# Altium PCB TestKitPcb.PcbDoc
Units mm, origin at the board's own origin, x right, y up, seen from the top; angles counter-clockwise.
Board outline 140 x 120 mm, 2 copper layers (L1, L2), stack 1.671 mm thick; 114 components, 64 nets, 330 pads, 62 vias.
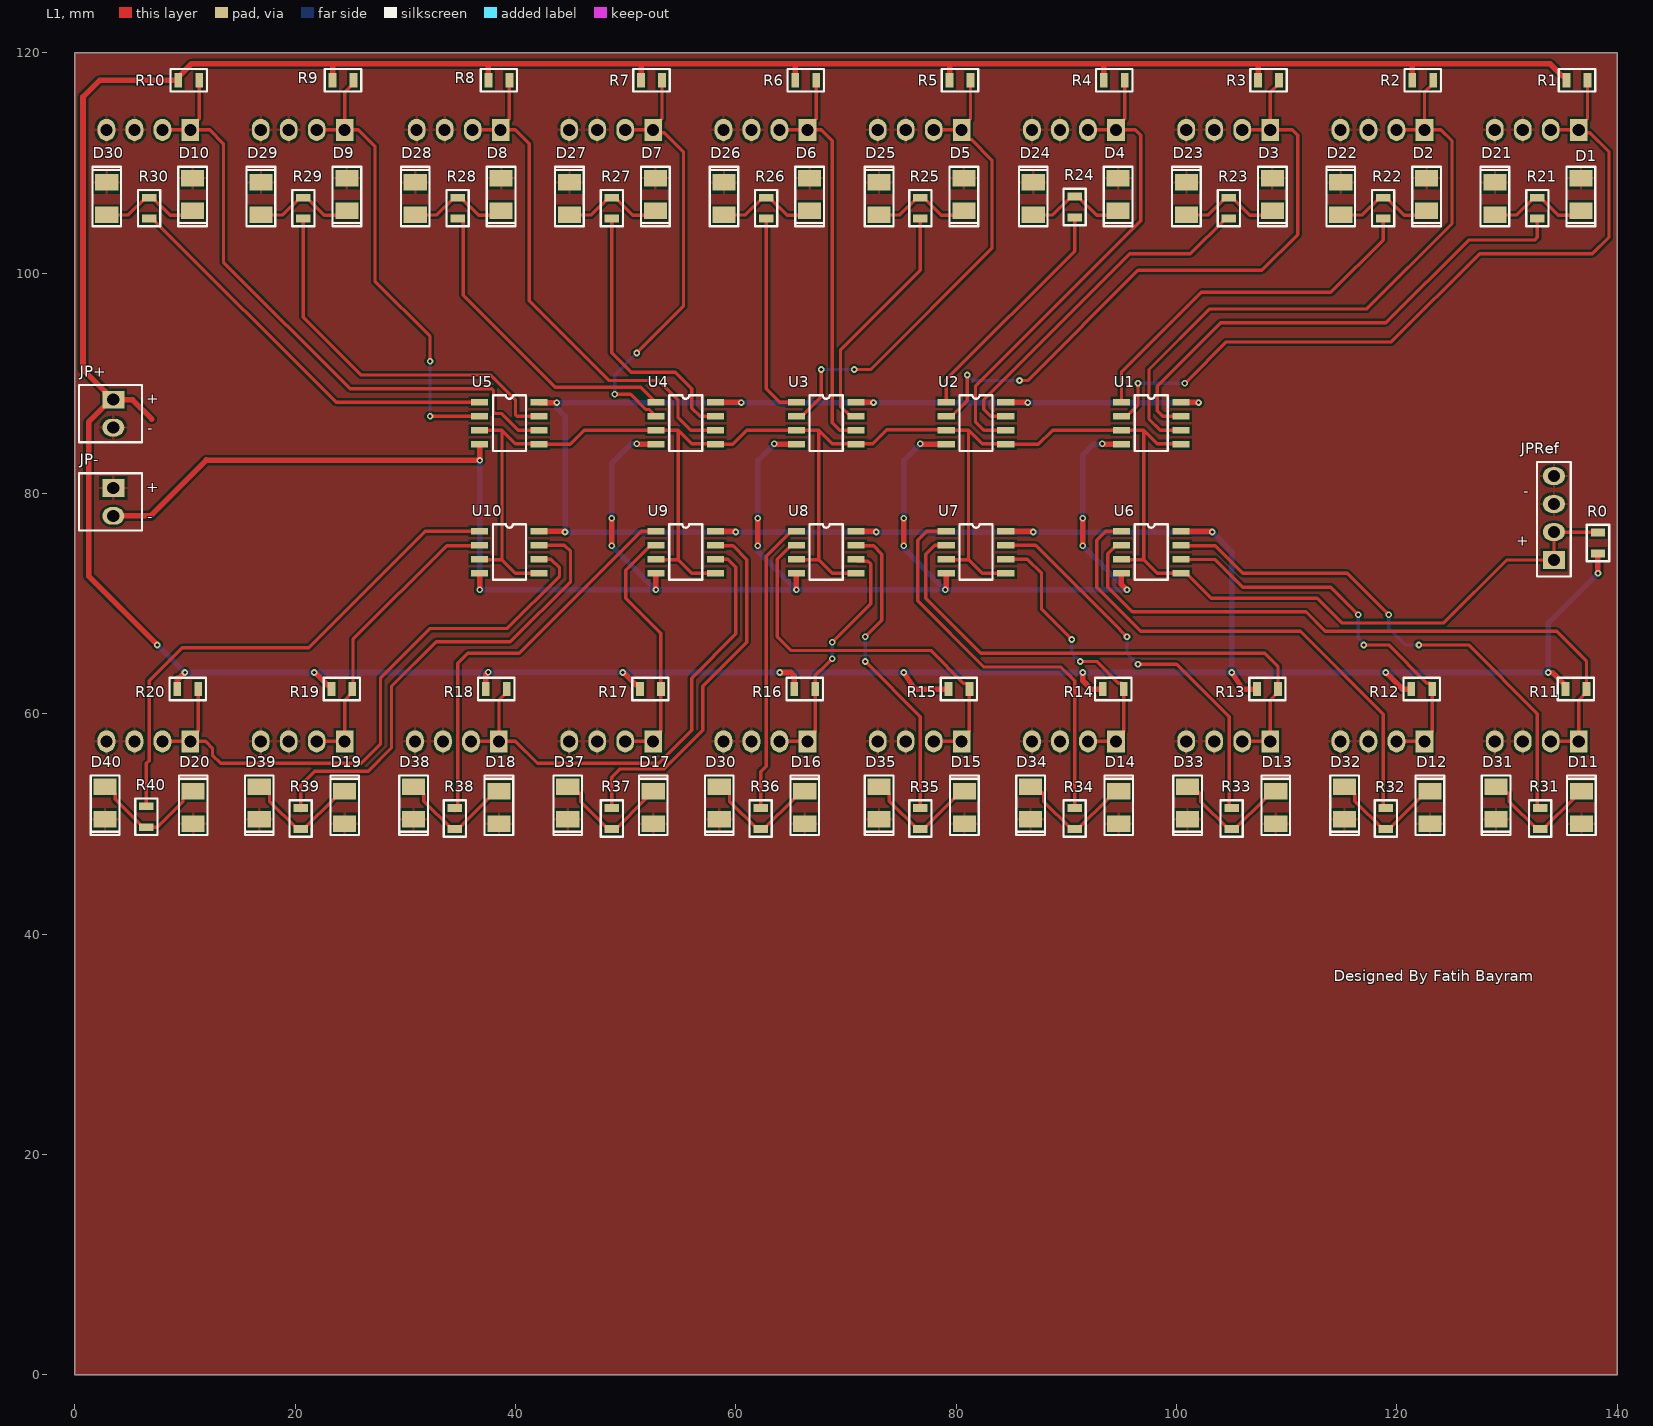
[diagram p0: L1 view]
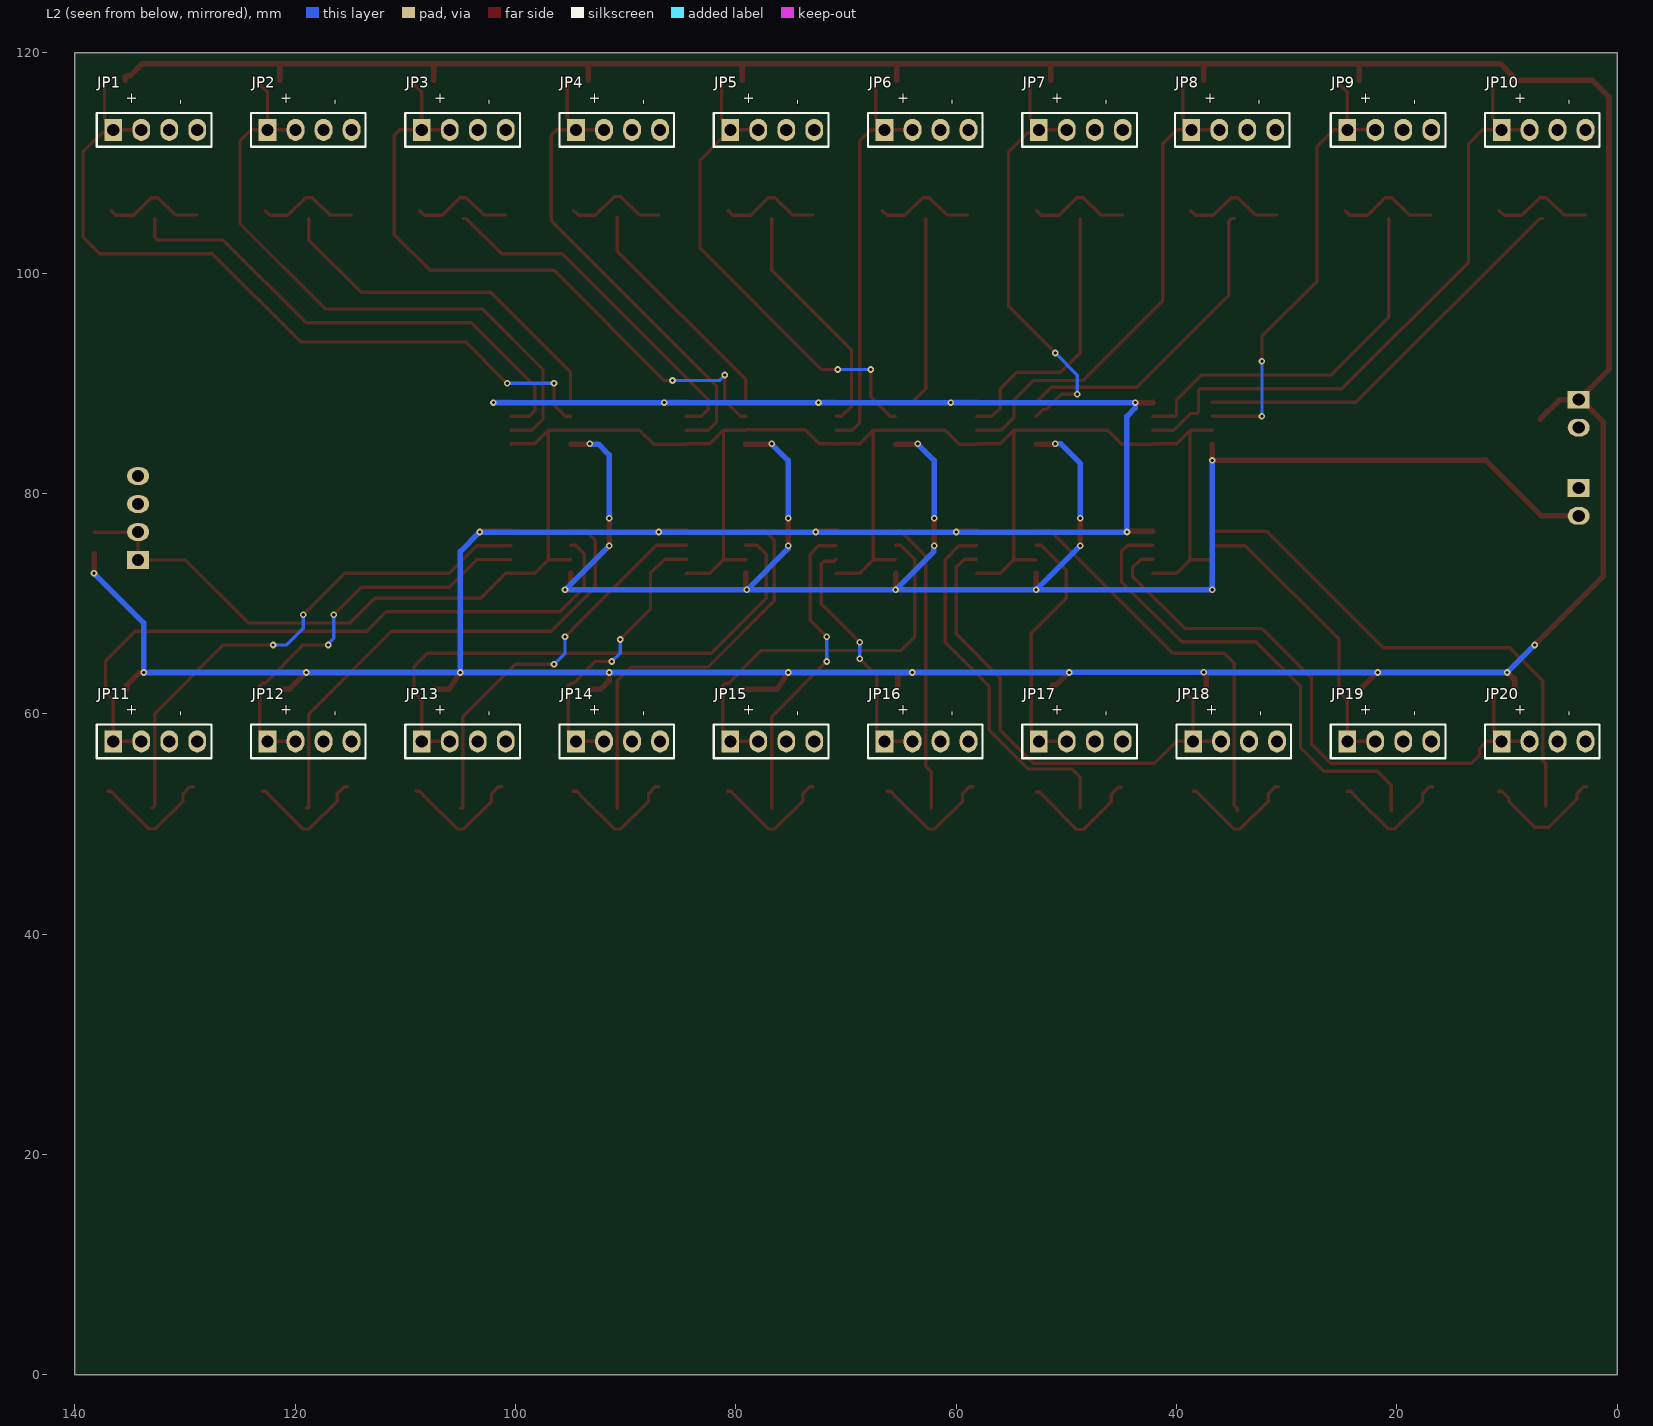
[diagram p1: L2 view, seen from below]
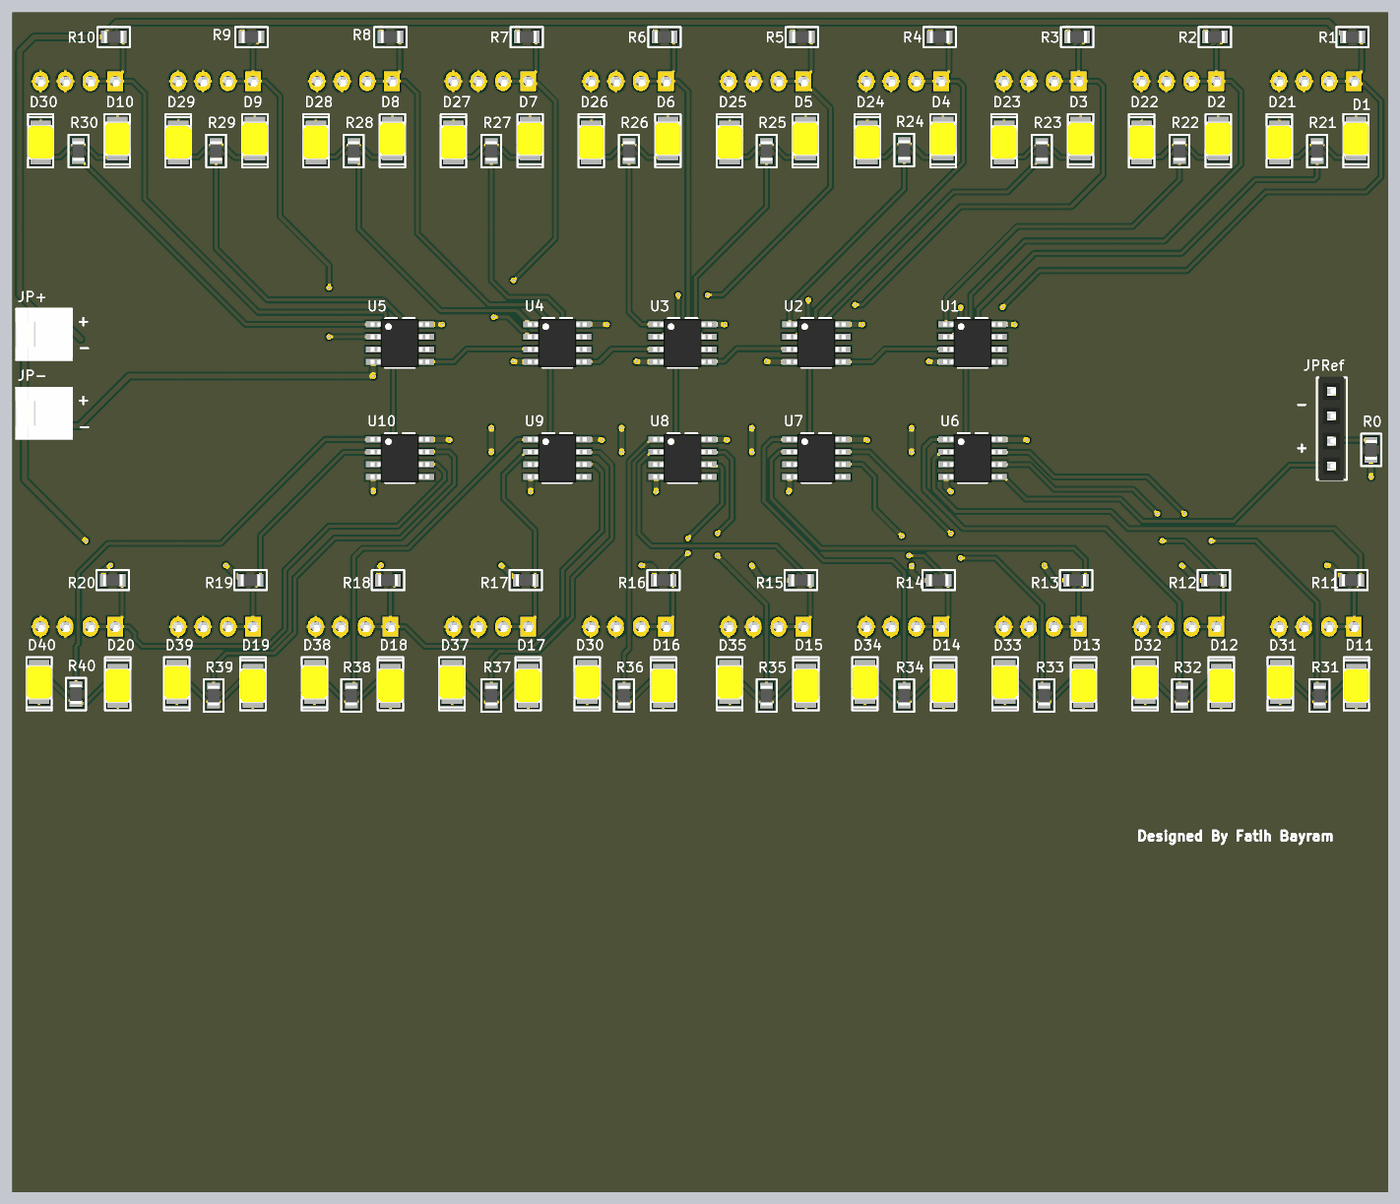
[diagram p2: 3D render of the assembled board from above, using the file's embedded part models]
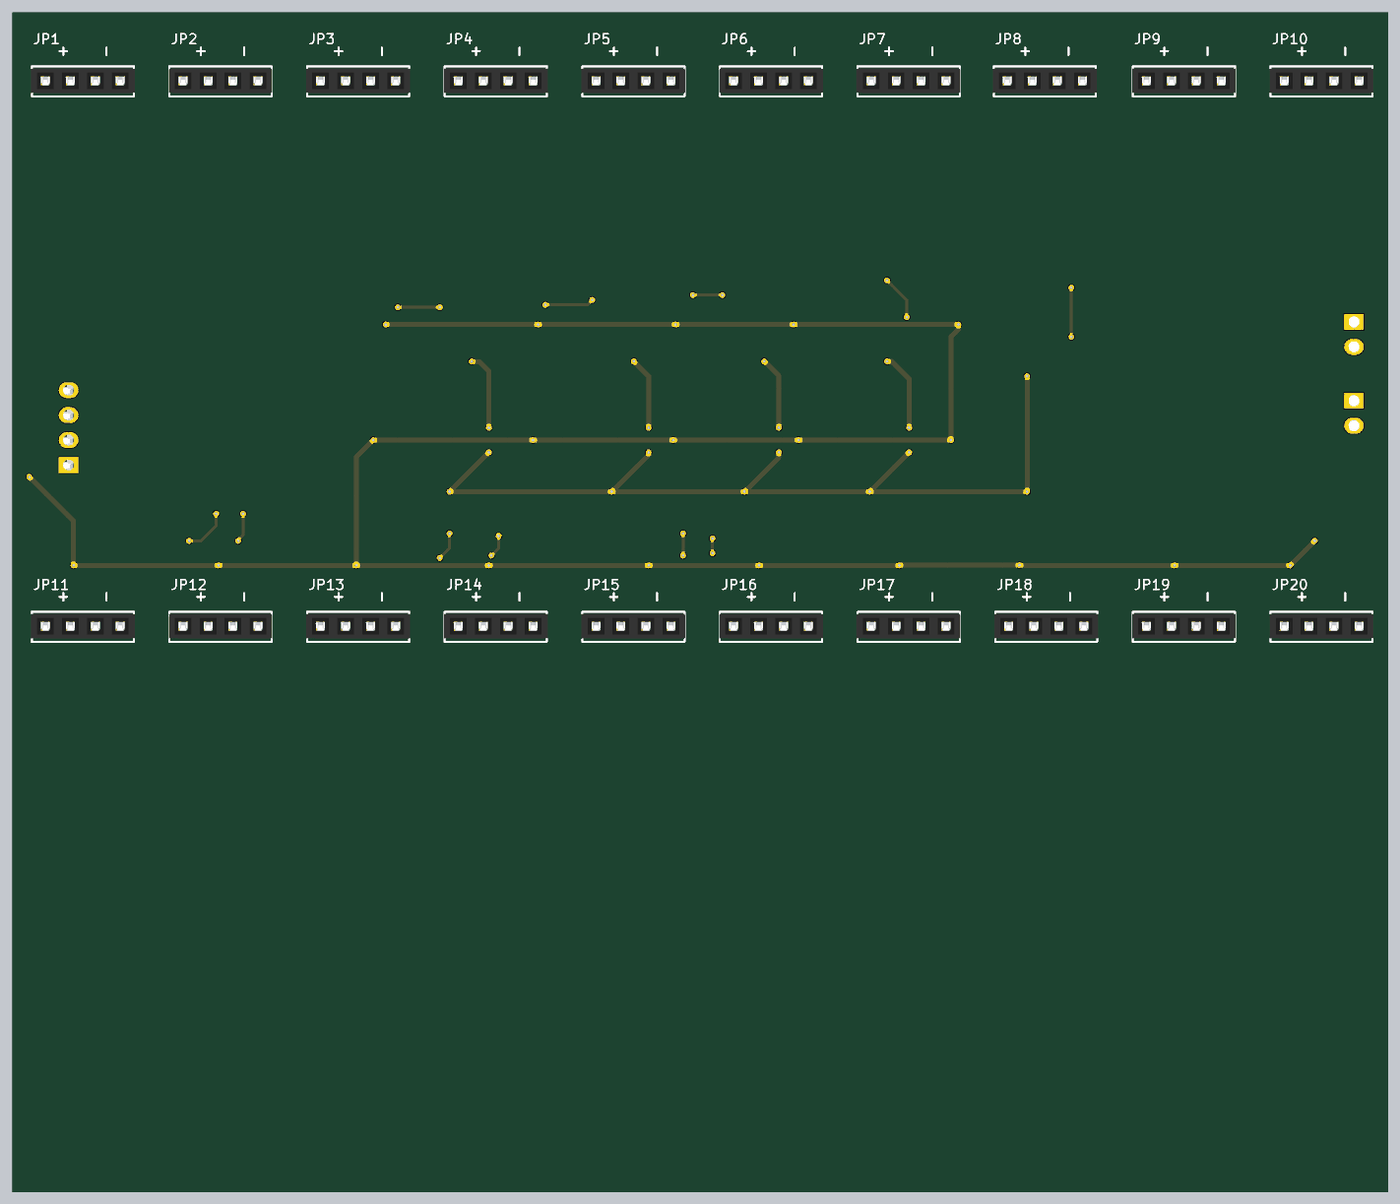
[diagram p3: 3D render of the assembled board from below, using the file's embedded part models]

## Layer stack, top to bottom
Top Solder: solder mask 0.0102, Solder Resist, Dk 3.5
L1: signal copper 0.0356
Dielectric 1: dielectric 1.6, FR-4, Dk 4.8
L2: signal copper 0.0356
Bottom Solder: solder mask 0.0102, Solder Resist, Dk 3.5

## Board outline
0,0 140,0 140,120 0,120

## Design rules (kind name [scope] priority, off if disabled: settings)
Clearance [All] p1: gap=0.2 ignorepadtopadclearanceinfootprint=FALSE
ComponentClearance [All] p1: gap=0.2 collisioncheckmode=3 verticalgap=0.2 showdistances=FALSE
HoleSize [All] p1: absolutevalues=TRUE maxlimit=10 minlimit=0.2 maxpercent=80.000 minpercent=20.000
HoleToHoleClearance [All] p1: gap=0.3 allowstackedmicrovias=TRUE
MinimumSolderMaskSliver [All] p1: minsoldermaskwidth=0.1
PolygonConnect [All] p1: connectstyle=Relief reliefconductorwidth=0.254 reliefentries=4 polygonreliefangle="90 Angle" airgapwidth=0.254
RoutingVias [All] p1: holewidth=0.3 width=0.6 viastyle="Through Hole" minholewidth=0.3 minwidth=0.6 maxholewidth=0.3 maxwidth=0.6
SilkToSilkClearance [All] p1: silktosilkclearance=0.1
SilkToSolderMaskClearance [IsPad] p1: minsilkscreentomaskgap=0.1 clearancetoexposedcopper=TRUE
SolderMaskExpansion [All] p1: expansion=0.1
Width Width_1 [All] p1: maxlimit=0.5 minlimit=0.3 preferedwidth=0.3
Width "Width POWERS" [InNet('-VCC')or InNet('VCC') or InNet('GND')] p2: maxlimit=4 minlimit=0.4 preferedwidth=0.5
24 further rules are at their usual default settings.

## Components (designator, comment, footprint, x,y, rotation, side; value= is the part's Value field where it differs from the comment)
D1 "GREEN" 2835_LED_GREEN 136.7,107.15 r270 top
D2 "GREEN" 2835_LED_GREEN 122.7,107.15 r270 top
D3 "GREEN" 2835_LED_GREEN 108.7,107.15 r270 top
D4 "GREEN" 2835_LED_GREEN 94.7,107.15 r270 top
D5 "GREEN" 2835_LED_GREEN 80.7,107.15 r270 top
D6 "GREEN" 2835_LED_GREEN 66.7,107.15 r270 top
D7 "GREEN" 2835_LED_GREEN 52.7,107.15 r270 top
D8 "GREEN" 2835_LED_GREEN 38.7,107.15 r270 top
D9 "GREEN" 2835_LED_GREEN 24.7,107.15 r270 top
D10 "GREEN" 2835_LED_GREEN 10.7,107.15 r270 top
D11 "GREEN" 2835_LED_GREEN 136.75,51.5 r90 top
D12 "GREEN" 2835_LED_GREEN 123,51.5 r90 top
D13 "GREEN" 2835_LED_GREEN 109,51.5 r90 top
D14 "GREEN" 2835_LED_GREEN 94.75,51.5 r90 top
D15 "GREEN" 2835_LED_GREEN 80.75,51.499 r90 top
D16 "GREEN" 2835_LED_GREEN 66.25,51.499 r90 top
D17 "GREEN" 2835_LED_GREEN 52.5,51.499 r90 top
D18 "GREEN" 2835_LED_GREEN 38.5,51.499 r90 top
D19 "GREEN" 2835_LED_GREEN 24.5,51.499 r90 top
D20 "GREEN" 2835_LED_GREEN 10.75,51.499 r90 top
D21 "RED" 2835_LED_RED 128.9,106.75 r90 top
D22 "RED" 2835_LED_RED 114.9,106.75 r90 top
D23 "RED" 2835_LED_RED 100.9,106.75 r90 top
D24 "RED" 2835_LED_RED 87,106.75 r90 top
D25 "RED" 2835_LED_RED 73,106.75 r90 top
D26 "RED" 2835_LED_RED 58.925,106.75 r90 top
D27 "RED" 2835_LED_RED 44.9,106.75 r90 top
D28 "RED" 2835_LED_RED 30.9,106.75 r90 top
D29 "RED" 2835_LED_RED 16.9,106.75 r90 top
D30 "RED" 2835_LED_RED 58.5,51.899 r270 top
D30 "RED" 2835_LED_RED 2.9,106.75 r90 top
D31 "RED" 2835_LED_RED 129,51.9 r270 top
D32 "RED" 2835_LED_RED 115.25,51.9 r270 top
D33 "RED" 2835_LED_RED 101,51.9 r270 top
D34 "RED" 2835_LED_RED 86.75,51.899 r270 top
D35 "RED" 2835_LED_RED 73,51.899 r270 top
D37 "RED" 2835_LED_RED 44.75,51.899 r270 top
D38 "RED" 2835_LED_RED 30.75,51.899 r270 top
D39 "RED" 2835_LED_RED 16.75,51.899 r270 top
D40 "RED" 2835_LED_RED 2.75,51.9 r270 top
JP1 "HDR" HDR_FAMELA_1X4_2.54MM 136.5,113 r90 bottom
JP2 "HDR" HDR_FAMELA_1X4_2.54MM 122.5,113 r90 bottom
JP3 "HDR" HDR_FAMELA_1X4_2.54MM 108.5,113 r90 bottom
JP4 "HDR" HDR_FAMELA_1X4_2.54MM 94.5,113 r90 bottom
JP5 "HDR" HDR_FAMELA_1X4_2.54MM 80.5,113 r90 bottom
JP6 "HDR" HDR_FAMELA_1X4_2.54MM 66.5,113 r90 bottom
JP7 "HDR" HDR_FAMELA_1X4_2.54MM 52.5,113 r90 bottom
JP8 "HDR" HDR_FAMELA_1X4_2.54MM 38.651,113 r90 bottom
JP9 "HDR" HDR_FAMELA_1X4_2.54MM 24.5,113 r90 bottom
JP10 "HDR" HDR_FAMELA_1X4_2.54MM 10.5,113 r90 bottom
JP11 "HDR" HDR_FAMELA_1X4_2.54MM 136.5,57.5 r90 bottom
JP12 "HDR" HDR_FAMELA_1X4_2.54MM 122.5,57.5 r90 bottom
JP13 "HDR" HDR_FAMELA_1X4_2.54MM 108.5,57.5 r90 bottom
JP14 "HDR" HDR_FAMELA_1X4_2.54MM 94.5,57.5 r90 bottom
JP15 "HDR" HDR_FAMELA_1X4_2.54MM 80.5,57.5 r90 bottom
JP16 "HDR" HDR_FAMELA_1X4_2.54MM 66.5,57.5 r90 bottom
JP17 "HDR" HDR_FAMELA_1X4_2.54MM 52.5,57.5 r90 bottom
JP18 "HDR" HDR_FAMELA_1X4_2.54MM 38.5,57.5 r90 bottom
JP19 "HDR" HDR_FAMELA_1X4_2.54MM 24.5,57.5 r90 bottom
JP20 "HDR" HDR_FAMELA_1X4_2.54MM 10.5,57.5 r90 bottom
JP+ "HDR" HDR_MALE_2X1_2.54 3.5,87.25 r0 top
JP- "HDR" HDR_MALE_2X1_2.54 3.5,79.23 r0 top
JPRef "HDR" HDR_FAMELA_1X4_2.54MM 134.25,73.96 r180 top
R0 "680R" R0805 138.25,75.5 r270 top
R1 "680R" R0805 136.349,117.5 r180 top
R2 "680R" R0805 122.349,117.5 r180 top
R3 "680R" R0805 108.349,117.5 r180 top
R4 "680R" R0805 94.349,117.5 r180 top
R5 "680R" R0805 80.349,117.5 r180 top
R6 "680R" R0805 66.349,117.5 r180 top
R7 "680R" R0805 52.349,117.5 r180 top
R8 "680R" R0805 38.5,117.5 r180 top
R9 "680R" R0805 24.349,117.5 r180 top
R10 "680R" R0805 10.349,117.5 r180 top
R11 "680R" R0805 136.25,62.25 r180 top
R12 "680R" R0805 122.25,62.25 r180 top
R13 "680R" R0805 108.25,62.25 r180 top
R14 "680R" R0805 94.25,62.25 r180 top
R15 "680R" R0805 80.25,62.25 r180 top
R16 "680R" R0805 66.25,62.25 r180 top
R17 "680R" R0805 52.25,62.25 r180 top
R18 "680R" R0805 38.25,62.25 r180 top
R19 "680R" R0805 24.25,62.25 r180 top
R20 "680R" R0805 10.25,62.25 r180 top
R21 "680R" R0805 132.75,105.901 r270 top
R22 "680R" R0805 118.75,105.901 r270 top
R23 "680R" R0805 104.75,105.901 r270 top
R24 "680R" R0805 90.75,106 r270 top
R25 "680R" R0805 76.75,105.901 r270 top
R26 "680R" R0805 62.75,105.901 r270 top
R27 "680R" R0805 48.75,105.901 r270 top
R28 "680R" R0805 34.75,105.901 r270 top
R29 "680R" R0805 20.75,105.901 r270 top
R30 "680R" R0805 6.75,105.901 r270 top
R31 "680R" R0805 133,50.5 r90 top
R32 "680R" R0805 119,50.5 r90 top
R33 "680R" R0805 105,50.5 r90 top
R34 "680R" R0805 90.75,50.5 r90 top
R35 "680R" R0805 76.75,50.5 r90 top
R36 "680R" R0805 62.25,50.5 r90 top
R37 "680R" R0805 48.75,50.5 r90 top
R38 "680R" R0805 34.5,50.5 r90 top
R39 "680R" R0805 20.5,50.5 r90 top
R40 "680R" R0805 6.5,50.65 r90 top
U1 "LM1458MX/NOPB" SOIC8 95,88.27 r0 top
U2 "LM1458MX/NOPB" SOIC8 79.1,88.27 r0 top
U3 "LM1458MX/NOPB" SOIC8 65.5,88.27 r0 top
U4 "LM1458MX/NOPB" SOIC8 52.75,88.27 r0 top
U5 "LM1458MX/NOPB" SOIC8 36.75,88.27 r0 top
U6 "LM1458MX/NOPB" SOIC8 95,76.57 r0 top
U7 "LM1458MX/NOPB" SOIC8 79.1,76.57 r0 top
U8 "LM1458MX/NOPB" SOIC8 65.5,76.57 r0 top
U9 "LM1458MX/NOPB" SOIC8 52.75,76.57 r0 top
U10 "LM1458MX/NOPB" SOIC8 36.75,76.57 r0 top

## Footprints (in the part's own frame and the unit in brackets; to place one, negate y for a bottom-side part, rotate by r counter-clockwise, add the part's x,y. Pads: shape width x height; smd on the part's side, far side on the other; paste and mask are expansions set on the pad)
2835_LED_GREEN [mm]
  rect 1.5x2.1 smd: 1(-1.475,0) 2(1.475,0)
  silkscreen extent -2.5,-1.3 2.9,1.3, body extent -1.73,-1.43 1.78,1.4, height 0.9
2835_LED_RED [mm]
  rect 1.5x2.1 smd: 1(-1.475,0) 2(1.475,0)
  silkscreen extent -2.5,-1.3 2.9,1.3, body extent -1.73,-1.43 1.78,1.4, height 0.9
HDR_FAMELA_1X4_2.54MM [mm]
  rect 2x1.6 hole 1.1: 1(0,0)
  oval 2x1.6 hole 1.1: 2(0,-2.54) 3(0,-5.08) 4(0,-7.62)
  silkscreen extent -1.52,-8.9 1.52,1.5, body extent -1.2,-8.98 1.3,1.58, height 8.51
HDR_MALE_2X1_2.54 [mm]
  rect 2x1.6 hole 1.1: 1(0,1.27)
  oval 2x1.6 hole 1.1: 2(0,-1.27)
  silkscreen extent -3.1,-2.6 2.6,2.6, body extent -3.17,-2.54 2.67,2.54, height 10.03
R0805 [mm]
  rect 0.7x1.3 smd: 1(-0.95,0) 2(0.95,0)
  silkscreen extent -1.65,-1.02 1.65,1.02, body extent -1,-0.6 1,0.6, height 0.71
SOIC8 [mm]
  rect 1.55x0.6 smd: 1(0,0) 2(0,-1.27) 3(0,-2.54) 4(0,-3.81) 5(5.4,-3.81) 6(5.4,-2.54) 7(5.4,-1.27) 8(5.4,0)
  silkscreen extent 1.2,-4.41 4.2,0.64, body extent -0.3,-4.36 5.7,0.55, height 1.75

## Part data
D1 D2 D3 D4 D5 D6 D7 D8 D9 D10 D11 D12 D13 D14 D15 D16 D17 D18 D19 D20: library part QBHP686-RH, "LED Uni-Color Green Automotive 2-Pin T/R", Case/Package=1113, Color=Red, Forward Voltage=2.4V, Lens Color=Colorless, Manufacturer 1=QT-Brightek, Supplier Part Number 1=1516-1369-1-ND, Test Current=150mA, Case Code (Imperial)=1113, ComponentLink1Description="http://www.qt-brightek.com/datasheet/QBHP686-XXH Series.pdf?src-supplier=Digi-Key", ComponentLink1URL="http://www.qt-brightek.com/datasheet/QBHP686-XXH Series.pdf?src-supplier=Digi-Key", Dominant Wavelength=620nm, Height=1mm, Length=3.1mm, Lens Style=Flat, Lens Transparency=Clear, Manufacturer Part Number 1=QBHP686-RH, Mount="Surface Mount", Packaging="Tape and Reel", Pricing 1="1=0,85000, 10=0,55300, 100=0,36250, 1000=0,28620 (USD)", RoHS=No, Stock 1=2880, Supplier 1=Digi-Key, Viewing Angle=120°, Width=2.8mm
D21 D22 D23 D24 D25 D26 D27 D28 D29 D30 D30 D31 D32 D33 D34 D35 D37 D38 D39 D40: library part QBHP686-RH_1, "LED Uni-Color Red Automotive 2-Pin T/R", Case/Package=1113, Color=Red, Forward Voltage=2.4V, Lens Color=Colorless, Manufacturer 1=QT-Brightek, Manufacturer Part Number 1=QBHP686-RH, Supplier Part Number 1=1516-1369-1-ND, Test Current=150mA, Case Code (Imperial)=1113, ComponentLink1Description="http://www.qt-brightek.com/datasheet/QBHP686-XXH Series.pdf?src-supplier=Digi-Key", ComponentLink1URL="http://www.qt-brightek.com/datasheet/QBHP686-XXH Series.pdf?src-supplier=Digi-Key", Dominant Wavelength=620nm, Height=1mm, Length=3.1mm, Lens Style=Flat, Lens Transparency=Clear, Mount="Surface Mount", Packaging="Tape and Reel", Pricing 1="1=0,85000, 10=0,55300, 100=0,36250, 1000=0,28620 (USD)", RoHS=No, Stock 1=2880, Supplier 1=Digi-Key, Viewing Angle=120°, Width=2.8mm
JP1 JP2 JP3 JP4 JP5 JP6 JP7 JP8 JP9 JP10 JP11 JP12 JP13 JP14 JP15 JP16 JP17 JP18 JP19 JP20 JPRef: library part M20-7820446, "2.54mm (0.1\") Pitch SIL Vertical PC Tail Socket Assembly, tin, 4 contacts", Case/Package=SIL, Color=Black, Contact Resistance=20mR, Current Rating=3A, Insulation Resistance=1MR, Manufacturer 1=Harwin, Max Operating Temperature=105°C, Min Operating Temperature=-40°C, Package Quantity=56, Supplier Part Number 1=952-1792-ND, ComponentLink1Description=https://datasheet.ciiva.com/11747/0900766b80dc1d2b-11747084.pdf?src-supplier=RSComponents, ComponentLink1URL=https://datasheet.ciiva.com/11747/0900766b80dc1d2b-11747084.pdf?src-supplier=RSComponents, ComponentLink2Description=https://datasheet.ciiva.com/16657/m20-782-16657321.pdf?src-supplier=Avnet+Europe, ComponentLink2URL=https://datasheet.ciiva.com/16657/m20-782-16657321.pdf?src-supplier=Avnet+Europe, ComponentLink3Description=https://datasheet.ciiva.com/7639/1836950-7639727.pdf?src-supplier=Element14, ComponentLink3URL=https://datasheet.ciiva.com/7639/1836950-7639727.pdf?src-supplier=Element14, ComponentLink4Description=https://datasheet.ciiva.com/6784/m20-782-6784360.pdf?src-supplier=Digi-Key, ComponentLink4URL=https://datasheet.ciiva.com/6784/m20-782-6784360.pdf?src-supplier=Digi-Key, ComponentLink5Description=https://datasheet.ciiva.com/10151/m20-782-10151359.pdf?src-supplier=Avnet, ComponentLink5URL=https://datasheet.ciiva.com/10151/m20-782-10151359.pdf?src-supplier=Avnet, Connector Type=Receptacle, Contact Gender=Female, Contact Material=Bronze, Contact Plating=Tin, Contact Type="Female Socket", Depth=2.5mm, Gender=Receptacle, Hole Diameter=0.8mm, Housing Color=Black, Housing Material=Polyamide, Lead Pitch=2.54mm, Length=10.56mm, Manufacturer Part Number 1=M20-7820446, Mating Cycles=50, Max Current Rating=3A, Mount="Through Hole", Number of Contacts=4, Number of Positions=4, Number of Rows=1, Orientation=Straight, Packaging=Rail/Tube, Pitch=2.54mm, Pricing 1="1=0,86000, 54=0,68593, 108=0,65602, 486=0,53677, 972=0,47712, 4914=0,41748, 9828=0,39760 (USD)", REACH SVHC="No SVHC", RoHS=Yes, RoHS Compliant=Yes, Series=M20, Stock 1=3184, Supplier 1=Digi-Key, Termination=Solder
JP+ JP-: library part 640456-2, "Connector 250V AC/DC 5A 2P 1 Row PCB - Vertical Mounting Polyester White", Color=Natural,White,Beige, Contact Current Rating=5A, Contact Resistance=6mR, Flammability Rating="UL94 V-0", Housing Color=Natural, Manufacturer 1="TE Connectivity", Max Operating Temperature=221°C, Max Voltage Rating (AC)=250V, Min Operating Temperature=-67°C, Package Quantity=5000, Supplier Part Number 1=A1921-ND, Approvals=CSA, Backwall/Post Interruptions="No (Without)", Circuit Application=Signal, ComponentLink1Description=https://datasheet.ciiva.com/709/eng-cd-640456-w1-709680.pdf?src-supplier=Digi-Key, ComponentLink1URL=https://datasheet.ciiva.com/709/eng-cd-640456-w1-709680.pdf?src-supplier=Digi-Key, ComponentLink2Description=https://datasheet.ciiva.com/3118/eng-ds-82056-mta-0608-3118497.pdf?src-supplier=Avnet, ComponentLink2URL=https://datasheet.ciiva.com/3118/eng-ds-82056-mta-0608-3118497.pdf?src-supplier=Avnet, ComponentLink3Description=https://datasheet.ciiva.com/25617/0900766b80027008-25617244.pdf?src-supplier=RSComponents, ComponentLink3URL=https://datasheet.ciiva.com/25617/0900766b80027008-25617244.pdf?src-supplier=RSComponents, ComponentLink4Description=https://datasheet.ciiva.com/14156/04384301-14156820.pdf?src-supplier=Distrelec, ComponentLink4URL=https://datasheet.ciiva.com/14156/04384301-14156820.pdf?src-supplier=Distrelec, ComponentLink5Description=https://datasheet.ciiva.com/11746/0900766b80eb7fdd-11746365.pdf?src-supplier=RSComponents, ComponentLink5URL=https://datasheet.ciiva.com/11746/0900766b80eb7fdd-11746365.pdf?src-supplier=RSComponents, ComponentLink6Description=https://datasheet.ciiva.com/16401/eng-ds-82056-mta-0608-16401289.pdf?src-supplier=Future+Electronics, ComponentLink6URL=https://datasheet.ciiva.com/16401/eng-ds-82056-mta-0608-16401289.pdf?src-supplier=Future+Electronics, ComponentLink7Description=https://datasheet.ciiva.com/7128/1866390-7128742.pdf?src-supplier=Newark, ComponentLink7URL=https://datasheet.ciiva.com/7128/1866390-7128742.pdf?src-supplier=Newark, ComponentLink8Description=https://datasheet.ciiva.com/16505/eng-ds-82056-mta-0608-16505419.pdf?src-supplier=Avnet+Asia, ComponentLink8URL=https://datasheet.ciiva.com/16505/eng-ds-82056-mta-0608-16505419.pdf?src-supplier=Avnet+Asia, Connector System=Wire-to-Board, Connector Type=Connector,Pin,Plug,Header, Contact Gender=Male, Contact Material="Copper Alloy", Contact Mating Length=7.49mm, Contact Plating=Tin, Contact Post Length=3.56mm, Contact Retention="No (Without)", Contact Shape=Square, Contact Style=Straight, Contact Type="Male Pin", Current Rating=5A, Depth=5.72mm, ELV=Compliant, Fastening Type=Friction, Gender=Male, Height=7.87mm, Housing Material=Polyester, Lead Free="Lead Free", Lead Pitch=2.54mm, Length=7.62mm, Manufacturer Part Number 1=640456-2, Mating Alignment="No (Without)", Mating Connector Lock="Yes (With)", Mating Retention="No (Without)", Mount="Through Hole", Mounting Ears="No (Without)", Number of Contacts=2, Number of Poles=2, Number of Positions=2, Number of Rows=1, Orientation=Straight, Packaging=Bulk, Panel Mount Retention="No (Without)", PCB Mount Alignment="No (Without)", PCB Mounting Orientation=Vertical, PCB Mount Retention=Without, PCB Thickness=0.063inch, Pitch=2.54mm, Plating Thickness=3.81um, Pricing 1="1=0,13000, 10=0,10100, 100=0,07480, 500=0,06188, 1000=0,05415, 5000=0,04641, 10000=0,04512 (USD)", Radiation Hardening=No, REACH SVHC="No SVHC", RoHS=Yes, RoHS Compliant=Yes, Sealable="No (Without)", Series=MTA-100, Shrouded="No (Without)", Stock 1=94059, Strain Relief="No (Without)", Supplier 1=Digi-Key, Tail Length=0.14inch, Termination=Solder, Voltage Rating=250V, Voltage Rating (AC)=250V, Working Voltage=250V
R0 R1 R2 R3 R4 R5 R6 R7 R8 R9 R10 R11 R12 R13 R14 R15 R16 R17 R18 R19 R20 R21 R22 R23 R24 R25 R26 R27 R28 R29 R30 R31 R32 R33 R34 R35 R36 R37 R38 R39 R40: library part RC0805FR-13680RL, "Surface Mount Thick Film Chip Resistors", Case/Package=0805, Case Code (Metric)=2012, Manufacturer 1=Yageo, Max Operating Temperature=155°C, Min Operating Temperature=-55°C, Power Rating=125mW, Resistor Type="Thick Film", Supplier Part Number 1=13-RC0805FR-13680RLCT-ND, Temperature Coefficient=100ppm/°C, Tolerance=1%, Voltage Rating=150V, Case Code (Imperial)=0805, ComponentLink1Description=http://www.mouser.com/ds/2/447/Yageo_08112016_RC0805-968729.pdf?src-supplier=Mouser, ComponentLink1URL=http://www.mouser.com/ds/2/447/Yageo_08112016_RC0805-968729.pdf?src-supplier=Mouser, ComponentLink2Description=http://www.yageo.com/documents/recent/PYu-RC_Group_51_RoHS_L_2.pdf?src-supplier=Avnet, ComponentLink2URL=http://www.yageo.com/documents/recent/PYu-RC_Group_51_RoHS_L_2.pdf?src-supplier=Avnet, Contact Plating=Tin,Matte, Height=0.5mm, Length=2mm, Manufacturer Part Number 1=RC0805FR-13680RL, Packaging="Tape and Reel", Pricing 1="1=0,10000, 10=0,04200, 100=0,01690, 1000=0,00759, 2500=0,00659, 5000=0,00544 (USD)", Radiation Hardening=No, Resistance=680R, RoHS=Yes, RoHS Compliant=Yes, Series=RC, Stock 1=19000, Supplier 1=Digi-Key, Termination=SMD/SMT, Width=1.25mm
U1 U2 U3 U4 U5 U6 U7 U8 U9 U10: library part "LM1458MX/NOPB (2)", "Dual 36V general-purpose operational amplifier 8-SOIC 0 to 70", Case/Package=SOIC, Input Bias Current=800nA, Input Offset Voltage (Vos)=6mV, Manufacturer 1="TI National Semiconductor", Max Dual Supply Voltage=18V, Max Operating Temperature=70°C, Max Power Dissipation=400mW, Min Dual Supply Voltage=3V, Min Operating Temperature=0°C, Nominal Supply Current=3mA, Output Current=45mA, Package Quantity=2500, Power Dissipation=500mW, Power Supply Rejection Ratio (PSRR)=77dB, Supplier Part Number 1=LM1458MX/NOPBCT-ND, Voltage Gain=104.08dB, Amplifier Type="GENERAL PURPOSE", Bandwidth=1MHz, Common Mode Rejection Ratio=70dB, ComponentLink1Description=https://datasheet.ciiva.com/26846/lm1458mx-nopb-26846585.pdf?src-supplier=IIIC, ComponentLink1URL=https://datasheet.ciiva.com/26846/lm1458mx-nopb-26846585.pdf?src-supplier=IIIC, ComponentLink2Description=https://datasheet.ciiva.com/6631/lm1458-6631087.pdf?src-supplier=Digi-Key, ComponentLink2URL=https://datasheet.ciiva.com/6631/lm1458-6631087.pdf?src-supplier=Digi-Key, ComponentLink3Description=https://datasheet.ciiva.com/6631/lm1458-6631085.pdf?src-supplier=Digi-Key, ComponentLink3URL=https://datasheet.ciiva.com/6631/lm1458-6631085.pdf?src-supplier=Digi-Key, Contact Plating=Tin, Gain Bandwidth Product=1MHz, Lead Free="Lead Free", Manufacturer Part Number 1=LM1458MX/NOPB, Max Supply Voltage=18V, Mount="Surface Mount", Number of Amplifiers=2, Number of Channels=2, Number of Circuits=2, Number of Elements=2, Number of Pins=8, Operating Supply Current=3mA, Packaging="Tape and Reel", Pricing 1="1=1,24000, 10=1,10700, 25=1,05080, 100=0,86310, 250=0,80676, 500=0,71296, 1000=0,61950 (USD)", Radiation Hardening=No, REACH SVHC="No SVHC", RoHS=Yes, RoHS Compliant=Yes, Slew Rate=0.5V/µs, Stock 1=4409, Supplier 1=Digi-Key, Technology=BIPOLAR, Unity Gain Bandwidth Product=1MHz

## Via types
v1: diameter 0.6, hole 0.3, L1 to L2, 62 vias

## Nets (pads, with @x,y where several pads share a name; then routed paths per layer and width w, separated by ;. In a path a pad name is that pad's centre, name@x,y a point inside that pad or via, vN(x,y) a via of type N, cw(c..) or ccw(c..) an arc to the next point about the centre after c; other vN are vias at no path point)
-VCC: JP-.2 U1.4 U2.4 U3.4 U4.4 U5.4 U6.4 U7.4 U8.4 U9.4 U10.4 | length 185.7
  L1 w0.5: JP-.2 6.874,77.96 11.957,83.043 12,83 v1(36.75,83) U5.4 ; v1(36.75,71.25) U10.4 ; v1(48.75,75.25) v1(48.75,77.75) ; v1(51,84.5) 51.027,84.5 51.067,84.46 U4.4 ; v1(52.75,71.25) U9.4 ; v1(62,75.25) v1(62,77.75) ; v1(63.5,84.5) 63.519,84.481 65.479,84.481 U3.4 ; v1(65.5,71.25) U8.4 ; v1(75.25,75.25) v1(75.25,77.75) ; v1(76.75,84.5) 76.769,84.481 79.079,84.481 U2.4 ; v1(79,71.25) 79,71.277 79.1,71.377 U7.4 ; v1(91.5,75.25) v1(91.5,77.75) ; v1(93.25,84.5) 93.269,84.481 94.979,84.481 U1.4 ; U6.4 95,71.75 v1(95.5,71.25)
  L2 w0.5: v1(36.75,83) v1(36.75,71.25) v1(52.75,71.25) ; v1(48.75,75.25) v1(52.75,71.25) ; v1(48.75,77.75) 48.75,82.75 50.5,84.5 v1(51,84.5) ; v1(62,75.25) 62.019,75.231 62.019,74.731 v1(65.5,71.25) ; v1(62,77.75) 62,83 v1(63.5,84.5) ; v1@75.25,75 v1(79,71.25) ; v1(75.25,77.75) 75.25,83 v1(76.75,84.5) ; v1(91.5,75.25) v1(95.5,71.25) v1(79,71.25) ; v1(91.5,77.75) 91.5,83.5 92.481,84.481 93.231,84.481 v1(93.25,84.5) ; v1(52.75,71.25) v1(65.5,71.25) ; v1(65.5,71.25) v1(79,71.25)
GND: D1.1 D2.1 D3.1 D4.1 D5.1 D6.1 D7.1 D8.1 D9.1 D10.1 D11.1 D12.1 D13.1 D14.1 D15.1 D16.1 D17.1 D18.1 D19.1 D20.1 D21.2 D22.2 D23.2 D24.2 D25.2 D26.2 D27.2 D28.2 D29.2 D30.2 D31.2 D32.2 D33.2 D34.2 D35.2 D37.2 D38.2 D39.2 D40.2 JP1.3 JP1.4 JP2.3 JP2.4 JP3.3 JP3.4 JP4.3 JP4.4 JP5.3 JP5.4 JP6.3 JP6.4 JP7.3 JP7.4 JP8.3 JP8.4 JP9.3 JP9.4 JP10.3 JP10.4 JP11.3 JP11.4 JP12.3 JP12.4 JP13.3 JP13.4 JP14.3 JP14.4 JP15.3 JP15.4 JP16.3 JP16.4 JP17.3 JP17.4 JP18.3 JP18.4 JP19.3 JP19.4 JP20.3 JP20.4 JP+.2 JP-.1 JPRef.3 JPRef.4
NetD1_2: D1.2 D21.1 R21.1 | length 9.3
  L1 w0.3: D21.1 130.874,105.275 132.45,106.851 R21.1 133.05,106.851 134.651,105.25 136.275,105.25 D1.2
NetD2_2: D2.2 D22.1 R22.1 | length 9.3
  L1 w0.3: D22.1 116.874,105.275 118.45,106.851 R22.1 119.05,106.851 120.651,105.25 122.275,105.25 D2.2
NetD3_2: D3.2 D23.1 R23.1 | length 9.3
  L1 w0.3: D23.1 102.874,105.275 104.45,106.851 R23.1 105.05,106.851 106.651,105.25 108.275,105.25 D3.2
NetD4_2: D4.2 D24.1 R24.1 | length 9.3
  L1 w0.3: D24.1 88.775,105.275 90.45,106.95 R24.1 91.05,106.95 92.75,105.25 94.275,105.25 D4.2
NetD5_2: D5.2 D25.1 R25.1 | length 9.2
  L1 w0.3: D25.1 74.874,105.275 76.45,106.851 R25.1 77.05,106.851 78.651,105.25 80.275,105.25 D5.2
NetD6_2: D6.2 D26.1 R26.1 | length 9.3
  L1 w0.3: D26.1 60.874,105.275 62.45,106.851 R26.1 63.05,106.851 64.651,105.25 66.275,105.25 D6.2
NetD7_2: D7.2 D27.1 R27.1 | length 9.3
  L1 w0.3: D27.1 46.874,105.275 48.45,106.851 R27.1 49.05,106.851 50.651,105.25 52.275,105.25 D7.2
NetD8_2: D8.2 D28.1 R28.1 | length 9.3
  L1 w0.3: D28.1 32.874,105.275 34.45,106.851 R28.1 35.05,106.851 36.651,105.25 38.275,105.25 D8.2
NetD9_2: D9.2 D29.1 R29.1 | length 9.3
  L1 w0.3: D29.1 18.874,105.275 20.45,106.851 R29.1 21.05,106.851 22.651,105.25 24.275,105.25 D9.2
NetD10_2: D10.2 D30.1@2.9,105.275 R30.1 | length 9.3
  L1 w0.3: D30.1@2.9,105.275 4.874,105.275 6.45,106.851 R30.1 7.05,106.851 8.651,105.25 10.275,105.25 D10.2
NetD11_2: D11.2 D31.1 R31.1 | length 11.2
  L1 w0.3: D31.1@129.25,53.374 129.55,53.374 130.173,52.751 130.173,52.077 132.7,49.55 R31.1 133.3,49.55 136.077,52.327 136.077,52.351 136.7,52.974 D11.2@137,52.974
NetD12_2: D12.2 D32.1 R32.1 | length 11.2
  L1 w0.3: D32.1 115.55,53.374 116.173,52.751 116.173,52.077 118.7,49.55 R32.1 119.3,49.55 122.077,52.327 122.077,52.351 122.7,52.974 D12.2
NetD13_2: D13.2 D33.1 R33.1 | length 11.2
  L1 w0.3: D33.1@101.25,53.374 101.55,53.374 102.173,52.751 102.173,52.077 104.7,49.55 R33.1 105.3,49.55 108.077,52.327 108.077,52.351 108.7,52.974 D13.2
NetD14_2: D14.2 D34.1 R34.1 | length 11.2
  L1 w0.3: D34.1@87,53.374 87.3,53.374 87.923,52.751 87.923,52.077 90.45,49.55 R34.1 91.05,49.55 93.827,52.327 93.827,52.351 94.45,52.974 D14.2
NetD15_2: D15.2 D35.1 R35.1 | length 11.2
  L1 w0.3: D35.1 73.3,53.374 73.923,52.751 73.923,52.077 76.45,49.55 R35.1 77.05,49.55 79.827,52.327 79.827,52.351 80.45,52.974 D15.2
NetD16_2: D16.2 D30.1@58.5,53.374 R36.1 | length 11.2
  L1 w0.3: D30.1@58.5,53.374 58.8,53.374 59.423,52.751 59.423,52.077 61.95,49.55 R36.1 62.55,49.55 65.327,52.327 65.327,52.351 65.95,52.974 D16.2
NetD17_2: D17.2 D37.1 R37.1 | length 11.2
  L1 w0.3: D37.1@45,53.324 45.3,53.324 45.923,52.701 45.923,52.027 48.45,49.5 48.75,49.5 49.05,49.5 51.827,52.277 51.827,52.301 52.45,52.924 D17.2@52.75,52.924
NetD18_2: D18.2 D38.1 R38.1 | length 11.2
  L1 w0.3: D38.1 31.05,53.374 31.673,52.751 31.673,52.077 34.2,49.55 R38.1 34.8,49.55 37.577,52.327 37.577,52.351 38.2,52.974 D18.2
NetD19_2: D19.2 D39.1 R39.1 | length 11.2
  L1 w0.3: D39.1 17.05,53.374 17.673,52.751 17.673,52.077 20.2,49.55 R39.1 20.8,49.55 23.577,52.327 23.577,52.351 24.2,52.974 D19.2
NetD20_2: D20.2 D40.1 R40.1 | length 11.4
  L1 w0.3: D40.1 3.05,53.375 3.673,52.752 3.673,52.228 6.2,49.701 R40.1 7.476,49.701 9.827,52.052 9.827,52.352 10.45,52.975 D20.2
NetJP1_1: JP1.1 JP1.2 R1.1 U1.2 | length 70.8
  L1 w0.3: U1.2 95.475,87 96.5,88.025 v1(96.5,90) ; v1(100.75,90) 101,90.25 104.5,93.75 119.5,93.75 127.5,101.75 137.75,101.75 139.25,103.25 139.25,111 137.5,112.75 136.75,112.75 JP1.1 ; JP1.2 JP1.1 ; R1.1 137.299,113.999 136.5,113.2 JP1.1
  L2 w0.3: v1(96.5,90) v1(100.75,90)
NetJP2_1: JP2.1 JP2.2 R2.1 U1.6 | length 58.6
  L1 w0.3: U1.6 98.52,85.73 97.5,86.75 97.5,91.25 103,96.75 117.25,96.75 125,104.5 125,112 124,113 JP2.1 ; JP2.2 JP2.1 ; R2.1 123.299,117.2 122.5,116.401 JP2.1
NetJP3_1: JP3.1 JP3.2 R3.1 U2.2 | length 59.6
  L1 w0.3: U2.2 79.575,87 81,88.425 v1(81,90.75) ; v1(85.75,90.25) 86.5,90.25 96.5,100.25 107.75,100.25 111,103.5 111,112.5 110.5,113 JP3.1 ; JP3.2 JP3.1 ; R3.1 109.299,117.2 108.5,116.401 JP3.1
  L2 w0.3: v1(81,90.75) 81.5,90.25 v1(85.75,90.25)
NetJP4_1: JP4.1 JP4.2 R4.1 U2.6 | length 45.1
  L1 w0.3: U2.6 82.52,85.73 81.75,86.5 81.75,89.75 96.75,104.75 96.75,112.5 96.25,113 JP4.1 ; JP4.2 JP4.1 ; R4.1 95.299,113.999 94.5,113.2 JP4.1
NetJP5_1: JP5.1 JP5.2 R5.1 U3.2 | length 44.9
  L1 w0.3: U3.2 65.975,87 67.75,88.775 v1(67.75,91.25) ; v1(70.75,91.25) 72.25,91.25 83.25,102.25 83.25,110.25 81.373,112.127 81.173,112.127 80.5,112.8 JP5.1 ; JP5.2 JP5.1 ; R5.1 81.299,113.999 80.5,113.2 JP5.1
  L2 w0.3: v1(67.75,91.25) v1(70.75,91.25)
NetJP6_1: JP6.1 JP6.2 R6.1 U3.6 | length 38.1
  L1 w0.3: JP6.2 JP6.1 ; R6.1 67.299,113.999 66.5,113.2 JP6.1 ; U3.6 69.419,85.73 68.75,86.399 68.75,112 67.75,113 JP6.1
NetJP7_1: JP7.1 JP7.2 R7.1 U4.2 | length 40.1
  L1 w0.3: v1(49,89) 50.45,89 51.83,87.62 52.13,87.62 U4.2 ; JP7.2 JP7.1 ; v1(51,92.75) 55.25,97 55.25,111 53.5,112.75 52.75,112.75 JP7.1 ; R7.1 53.299,113.999 52.5,113.2 JP7.1
  L2 w0.3: v1(49,89) 49,90.75 v1(51,92.75)
NetJP8_1: JP8.1 JP8.2 R8.1 U4.6 | length 47.5
  L1 w0.3: JP8.2 JP8.1 ; R8.1 39.45,113.999 38.651,113.2 JP8.1 ; U4.6 58.13,85.75 55.899,85.75 54.75,86.899 54.75,88.5 53,90.25 48.5,90.25 41.25,97.5 41.25,111.75 40,113 JP8.1
NetJP9_1: JP9.1 JP9.2 R9.1 U5.2 | length 41.8
  L1 w0.3: JP9.2 JP9.1 ; R9.1 25.299,117.2 24.5,116.401 JP9.1 ; v1(32.25,87) U5.2 ; v1(32.25,92) 32.25,94.25 27.25,99.25 27.25,111.5 25.75,113 JP9.1
  L2 w0.3: v1(32.25,87) v1(32.25,92)
NetJP10_1: JP10.1 JP10.2 R10.1 U5.6 | length 57.8
  L1 w0.3: JP10.2 JP10.1 ; R10.1 11.299,113.999 10.5,113.2 JP10.1 ; U5.6 42.13,85.75 40.25,85.75 38.75,87.25 38.149,87.25 38,87.399 38,89.351 37.851,89.5 25,89.5 13.5,101 13.5,111.75 12.25,113 JP10.1
NetJP11_1: JP11.1 JP11.2 R11.1 U6.2 | length 61
  L1 w0.3: U6.2 94.525,75.3 93.75,74.525 93.75,71.5 96,69.25 111.75,69.25 113.5,67.5 134.5,67.5 137.2,64.8 R11.1 137.2,61.95 136.5,61.25 JP11.1 JP11.2
NetJP12_1: JP12.1 JP12.2 R12.1 U6.6 | length 36.8
  L1 w0.3: U6.6 100.43,74 103.5,74 106,71.5 114,71.5 v1(116.5,69) ; v1(117,66.25) 119.25,66.25 122.727,62.773 122.977,62.773 123.2,62.55 R12.1 123.2,58.4 122.5,57.7 JP12.1 JP12.2
  L2 w0.3: v1(116.5,69) 116.5,66.844 117,66.344 v1(117,66.25)
NetJP13_1: JP13.1 JP13.2 R13.1 U7.2 | length 50.3
  L1 w0.3: U7.2 78.05,75.3 77.25,74.5 77.25,70.5 82.25,65.5 108,65.5 109.2,64.3 R13.1 109.2,61.95 108.5,61.25 JP13.1 JP13.2
NetJP14_1: JP14.1 JP14.2 R14.1 U7.6 | length 26
  L1 w0.3: U7.6 86.47,74.03 87.75,72.75 87.75,69.5 v1(90.5,66.75) ; v1(91.25,64.75) 92.75,64.75 94.727,62.773 94.977,62.773 95.2,62.55 R14.1 95.2,58.4 94.5,57.7 JP14.1 JP14.2
  L2 w0.3: v1(90.5,66.75) 90.5,65.5 v1(91.25,64.75)
NetJP15_1: JP15.1 JP15.2 R15.1 U8.2 | length 36.5
  L1 w0.3: U8.2 65.025,75.3 63.75,74.025 63.75,67 65,65.75 77.7,65.75 80.7,62.75 81,62.75 81.2,62.55 R15.1 81.2,58.4 80.5,57.7 JP15.1 JP15.2
NetJP16_1: JP16.1 JP16.2 R16.1 U8.6 | length 22.6
  L1 w0.3: JP16.2 JP16.1 66.5,57.7 67.2,58.4 R16.1 67.2,63.5 67.65,63.95 67.7,63.95 v1(68.75,65) ; v1(68.75,66.5) 72.25,70 72.25,73.601 71.994,73.857 71.073,73.857 U8.6
  L2 w0.3: v1(68.75,65) v1(68.75,66.5)
NetJP17_1: JP17.1 JP17.2 R17.1 U9.2 | length 23.4
  L1 w0.3: JP17.2 JP17.1 52.5,57.7 53.2,58.4 R17.1 53.2,67.3 50,70.5 50,73.025 52.275,75.3 U9.2
NetJP18_1: JP18.1 JP18.2 R18.1 U9.6 | length 45.8
  L1 w0.3: JP18.2 JP18.1 ; R18.1 39.2,61.95 38.5,61.25 JP18.1 ; U9.6 59.272,74.03 60,73.302 60,67.25 56,63.25 56,58.5 53,55.5 42,55.5 40,57.5 JP18.1
NetJP19_1: JP19.1 JP19.2 R19.1 U10.2 | length 27.1
  L1 w0.3: JP19.2 JP19.1 24.5,61.25 25.2,61.95 R19.1 25.25,62.3 25.25,66.75 33.75,75.25 36.7,75.25 U10.2
NetJP20_1: JP20.1 JP20.2 R20.1 U10.6 | length 55.8
  L1 w0.3: JP20.2 JP20.1 ; R20.1 11.2,58.4 10.5,57.7 JP20.1 ; U10.6 43.22,74.03 44,73.25 44,72.5 39.25,67.75 32.25,67.75 27.75,63.25 27.75,57.25 26,55.5 13.25,55.5 12.5,56.25 12.5,56.875 11.875,57.5 JP20.1
NetR21_2: R21.2 U1.7 | length 46.4
  L1 w0.3: U1.7 98.75,87 98.25,87.5 98.25,89.75 104,95.5 119,95.5 126.5,103 132.5,103 132.75,103.25 R21.2
NetR22_2: R22.2 U1.1 | length 33.4
  L1 w0.3: U1.1 95,91 102.25,98.25 114,98.25 118.75,103 R22.2
NetR23_2: R23.2 U2.7 | length 32.2
  L1 w0.3: U2.7 83.149,87 82.5,87.649 82.5,88.5 95.75,101.75 101.249,101.75 104.45,104.951 R23.2
NetR24_2: R24.2 U2.1 | length 21.6
  L1 w0.3: U2.1 79.1,90.35 90.75,102 R24.2
NetR25_2: R25.2 U3.7 | length 21.8
  L1 w0.3: U3.7 70.425,87 69.5,87.925 69.5,93 76.75,100.25 R25.2
NetR26_2: R26.2 U3.1 | length 18.7
  L1 w0.3: R26.2 62.75,89.5 63.98,88.27 U3.1
NetR27_2: R27.2 U4.7 | length 25
  L1 w0.3: R27.2 48.75,92.75 50.5,91 54.5,91 56,89.5 56,87.75 56.75,87 U4.7
NetR28_2: R28.2 U4.1 | length 28.9
  L1 w0.3: R28.2 35.05,104.951 35.273,104.728 35.273,97.977 43.6,89.65 51.37,89.65 U4.1
NetR29_2: R29.2 U5.7 | length 34.9
  L1 w0.3: R29.2 20.75,96 26,90.75 37.75,90.75 40,88.5 40,87.149 40.149,87 U5.7
NetR30_2: R30.2 U5.1 | length 36.9
  L1 w0.3: R30.2 7.05,104.951 23.731,88.27 U5.1
NetR31_2: R31.2 U6.7 | length 48.1
  L1 w0.3: U6.7 100.45,75.25 103.5,75.25 106,72.75 115.5,72.75 v1(119.25,69) ; v1(122,66.25) 126.5,66.25 132.75,60 132.75,51.673 132.973,51.45 R31.2
  L2 w0.3: v1(119.25,69) 119.25,67.75 120.75,66.25 v1(122,66.25)
NetR32_2: R32.2 U6.1 | length 46.4
  L1 w0.3: U6.1 93.57,76.57 92.75,75.75 92.75,71.5 96.75,67.5 111.25,67.5 118.77,59.98 118.77,51.45 R32.2
NetR33_2: R33.2 U7.7 | length 36.1
  L1 w0.3: U7.7 87.2,75.3 94.25,68.25 v1(95.5,67) ; v1(96.5,64.5) 100,64.5 104.77,59.73 104.77,51.45 R33.2
  L2 w0.3: v1(95.5,67) 95.5,65.5 v1(96.5,64.5)
NetR34_2: R34.2 U7.1 | length 37.2
  L1 w0.3: U7.1 77.32,76.57 76.5,75.75 76.5,70.25 82.5,64.25 89.5,64.25 90.75,63 R34.2
NetR35_2: R35.2 U8.7 | length 28.4
  L1 w0.3: U8.7 70.95,75.25 72.5,75.25 73.25,74.5 73.25,68.5 v1(71.75,67) ; v1(71.75,64.75) 76.75,59.75 R35.2
  L2 w0.3: v1(71.75,64.75) v1(71.75,67)
NetR36_2: R36.2 U8.1 | length 26.7
  L1 w0.3: R36.2 62.25,54.75 62.75,55.25 62.75,74.295 65.025,76.57 U8.1
NetR37_2: R37.2 U9.7 | length 33.4
  L1 w0.3: R37.2 48.75,54.25 49.5,55 53.5,55 57,58.5 57,62.5 61,66.5 61,74 59.75,75.25 58.2,75.25 U9.7
NetR38_2: R38.2 U9.1 | length 36.5
  L1 w0.3: R38.2@34.5,51.2 R38.2 34.55,51.45 34.75,51.65 34.75,64.601 35.649,65.5 40.329,65.5 51.399,76.57 U9.1
NetR39_2: R39.2 U10.7 | length 43.6
  L1 w0.3: R39.2@20.5,51.2 R39.2 20.5,53.5 21.796,54.796 26.647,54.796 28.75,56.899 28.75,62.5 32.796,66.546 39.546,66.546 45,72 45,74.75 44.45,75.3 U10.7
NetR40_2: R40.2 U10.1 | length 47.1
  L1 w0.3: R40.2@6.5,51.601 6.5,55.5 6.75,55.75 6.75,63 9.75,66 21.25,66 31.82,76.57 U10.1
Reference: JPRef.1 JPRef.2 R0.1 U1.3 U1.5 U2.3 U2.5 U3.3 U3.5 U4.3 U4.5 U5.3 U5.5 U6.3 U6.5 U7.3 U7.5 U8.3 U8.5 U9.3 U9.5 U10.3 U10.5 | length 201.8
  L1 w0.3: U10.3@36.75,73.98 38.77,73.98 ; U5.3 38.77,85.73 ; U10.5@41.61,72.75 U10.5@41.65,72.71 ; U10.5@42.15,72.71 42.11,72.75 40,72.75 38.77,73.98 ; U9.3@52.75,73.98 54.77,73.98 ; U9.5@57.61,72.75 U9.5@57.65,72.71 ; U9.5@58.15,72.71 58.11,72.75 56,72.75 54.77,73.98 ; U8.3@65.5,73.98 67.52,73.98 ; U8.5@70.36,72.75 U8.5@70.4,72.71 ; U8.5@70.9,72.71 70.86,72.75 68.75,72.75 67.52,73.98 ; U3.5 U3.5@70.86,84.5 ; U7.3@79.1,73.98 81.12,73.98 ; U7.5@83.96,72.75 U7.5@84,72.71 ; U7.5@84.5,72.71 84.46,72.75 82.35,72.75 81.12,73.98 ; U6.3@95,73.98 97.02,73.98 ; U6.5@99.9,72.71 U6.5@99.86,72.75 ; U6.5@100.4,72.71 100.36,72.75 U6.5@99.86,72.75 ; U6.5 100.875,72.76 103.135,70.5 112.75,70.5 115,68.25 124.25,68.25 129.96,73.96 JPRef.1 JPRef.2 134.275,76.475 138.225,76.475 R0.1 ; U1.5 100.36,84.5 98.25,84.5 97.02,85.73 ; 38.77,73.98 38.77,85.73 ; 38.77,85.73 40,84.5 42.11,84.5 U5.5 44.96,84.46 46.25,85.75 52.73,85.75 U4.3 54.77,85.73 ; 54.77,73.98 54.77,85.73 ; 54.77,85.73 56,84.5 58.11,84.5 U4.5 59.71,84.46 61,85.75 65.48,85.75 U3.3 67.52,85.73 ; 67.52,73.98 67.52,85.73 ; 67.52,85.73 68.75,84.5 U3.5@70.86,84.5 ; U3.5@70.86,84.5 72.42,84.5 73.71,85.79 79.04,85.79 U2.3 81.12,85.73 ; 81.12,73.98 81.12,85.73 ; 81.12,85.73 82.35,84.5 84.46,84.5 U2.5 87.46,84.46 88.75,85.75 94.98,85.75 U1.3 97.02,85.73 ; 97.02,73.98 98.25,72.75 U6.5@99.86,72.75 ; 97.02,73.98 97.02,85.73
VCC: JP+.1 R0.2 R1.2 R2.2 R3.2 R4.2 R5.2 R6.2 R7.2 R8.2 R9.2 R10.2 R11.2 R12.2 R13.2 R14.2 R15.2 R16.2 R17.2 R18.2 R19.2 R20.2 U1.8 U2.8 U3.8 U4.8 U5.8 U6.8 U7.8 U8.8 U9.8 U10.8 | length 537.2
  L1 w0.5: 7,86.75 5.25,88.5 3.52,88.5 JP+.1 JP+.1@3.3,88.52 ; v1(7.5,66.25) 1.25,72.5 1.25,86.47 JP+.1@3.3,88.52 ; R20.2 9.3,63.25 9.473,63.25 9.973,63.75 v1(10,63.75) ; v1@21.969,63.581 R19.2 ; R9.2 23.399,118.851 23.25,119 ; R18.2 37.3,63.55 v1(37.525,63.775) ; R8.2 37.55,118.95 37.5,119 ; U10.8 44.403,76.57 44.473,76.5 v1(44.5,76.5) ; U5.8 42.17,88.25 v1(43.75,88.25) ; v1@49.775,63.775 50.9,62.65 51.2,62.65 51.3,62.55 R17.2 ; R7.2 51.399,118.851 51.25,119 ; U9.8 59.903,76.57 59.973,76.5 v1(60,76.5) ; U4.8 58.16,88.26 60.49,88.26 v1(60.5,88.25) ; v1(64,63.75) 65,63.75 65.3,63.45 R16.2 ; R6.2 65.399,118.851 65.25,119 ; U8.8 72.653,76.57 72.723,76.5 v1(72.75,76.5) ; U3.8 70.91,88.26 72.49,88.26 v1(72.5,88.25) ; v1(75.25,63.75) 76.25,62.25 R15.2 ; R5.2 79.399,118.899 79.5,119 ; U7.8 86.903,76.57 86.973,76.5 v1(87,76.5) ; U2.8 84.51,88.26 86.49,88.26 v1(86.5,88.25) ; v1(91.5,63.75) 91.5,63 92.25,62.25 R14.2 ; R4.2 93.399,118.851 93.25,119 ; U6.8 103.153,76.57 103.223,76.5 v1(103.25,76.5) ; U1.8 100.41,88.26 101.99,88.26 v1(102,88.25) ; v1(105,63.75) 106,62.25 R13.2 ; R3.2 107.399,118.899 107.5,119 ; v1(119,63.75) 120.5,62.25 R12.2 ; R2.2 121.399,118.899 121.5,119 ; 134.119,63.731 135.3,62.55 R11.2 ; R1.2 135.399,117.8 135.299,117.9 134.999,117.9 133.899,119 121.5,119 ; v1(138.25,72.75) R0.2 ; JP+.1@3.3,88.52 2.75,89.07 2.75,89.27 0.75,91.27 0.75,116 2.25,117.5 R10.2 9.399,117.8 10.599,119 23.25,119 ; 23.25,119 37.5,119 ; 37.5,119 51.25,119 ; 51.25,119 65.25,119 ; 65.25,119 79.5,119 ; 79.5,119 93.25,119 ; 93.25,119 107.5,119 ; 107.5,119 121.5,119
  L2 w0.5: v1(7.5,66.25) v1(10,63.75) v1(21.75,63.75) 37,63.75 37.006,63.756 37.506,63.756 v1(37.525,63.775) 37.537,63.762 49.738,63.762 v1(49.75,63.75) v1(64,63.75) v1(75.25,63.75) v1(91.5,63.75) v1(105,63.75) ; v1(102,88.25) v1(86.5,88.25) v1(72.5,88.25) v1(60.5,88.25) v1(43.75,88.25) 43.75,87.75 44.5,87 v1(44.5,76.5) v1(60,76.5) v1(72.75,76.5) v1(87,76.5) v1(103.25,76.5) 105,74.75 v1(105,63.75) ; v1(138.25,72.75) 133.75,68.25 v1(133.75,63.75) v1(119,63.75) v1(105,63.75)

## Polygon pours and split planes (outlines as drawn)
no net on L1 "L1-No Net" (solid, pour order 4): 0,0 140,0 140,120 0,120
GND on L1 "L1-GND" (solid, pour order 0): 0,0 140,0 140,120 0,120

## Silkscreen, mask and mechanical layers (free items; w line width, h text height)
Top Overlay:
  text "Designed By Fatih Bayram" at 114.25,35.75 h1

## Text inside footprints (layer, text, board x,y; h text height)
JP1: Bottom Overlay "+" at 134.4,115.3 h1 r270; Bottom Overlay "-" at 130,115.3 h1 r270
JP2: Bottom Overlay "+" at 120.4,115.3 h1 r270; Bottom Overlay "-" at 116,115.3 h1 r270
JP3: Bottom Overlay "-" at 102,115.3 h1 r270; Bottom Overlay "+" at 106.4,115.3 h1 r270
JP4: Bottom Overlay "+" at 92.4,115.3 h1 r270; Bottom Overlay "-" at 88,115.3 h1 r270
JP5: Bottom Overlay "-" at 74,115.3 h1 r270; Bottom Overlay "+" at 78.4,115.3 h1 r270
JP6: Bottom Overlay "+" at 64.4,115.3 h1 r270; Bottom Overlay "-" at 60,115.3 h1 r270
JP7: Bottom Overlay "-" at 46,115.3 h1 r270; Bottom Overlay "+" at 50.4,115.3 h1 r270
JP8: Bottom Overlay "+" at 36.551,115.3 h1 r270; Bottom Overlay "-" at 32.151,115.3 h1 r270
JP9: Bottom Overlay "-" at 18,115.3 h1 r270; Bottom Overlay "+" at 22.4,115.3 h1 r270
JP10: Bottom Overlay "+" at 8.4,115.3 h1 r270; Bottom Overlay "-" at 4,115.3 h1 r270
JP11: Bottom Overlay "+" at 134.4,59.8 h1 r270; Bottom Overlay "-" at 130,59.8 h1 r270
JP12: Bottom Overlay "-" at 116,59.8 h1 r270; Bottom Overlay "+" at 120.4,59.8 h1 r270
JP13: Bottom Overlay "+" at 106.4,59.8 h1 r270; Bottom Overlay "-" at 102,59.8 h1 r270
JP14: Bottom Overlay "-" at 88,59.8 h1 r270; Bottom Overlay "+" at 92.4,59.8 h1 r270
JP15: Bottom Overlay "+" at 78.4,59.8 h1 r270; Bottom Overlay "-" at 74,59.8 h1 r270
JP16: Bottom Overlay "-" at 60,59.8 h1 r270; Bottom Overlay "+" at 64.4,59.8 h1 r270
JP17: Bottom Overlay "+" at 50.4,59.8 h1 r270; Bottom Overlay "-" at 46,59.8 h1 r270
JP18: Bottom Overlay "-" at 32,59.8 h1 r270; Bottom Overlay "+" at 36.4,59.8 h1 r270
JP19: Bottom Overlay "+" at 22.4,59.8 h1 r270; Bottom Overlay "-" at 18,59.8 h1 r270
JP20: Bottom Overlay "-" at 4,59.8 h1 r270; Bottom Overlay "+" at 8.4,59.8 h1 r270
JP+: Top Overlay "+" at 6.5,88.15 h1; Top Overlay "-" at 6.6,85.45 h1
JP-: Top Overlay "-" at 6.6,77.43 h1; Top Overlay "+" at 6.5,80.13 h1
JPRef: Top Overlay "-" at 131.95,80.46 h1 r180; Top Overlay "+" at 131.95,76.06 h1 r180